# Altium PCB AD8317.PcbDoc
Units mil, origin at the board's own origin, x right, y up, seen from the top; angles counter-clockwise.
Board outline 658 x 549 mil, 4 copper layers (Top Layer, Layer 1, Layer 2, Bottom Layer), stack 23.756 mil thick; 16 components, 9 nets, 47 pads, 45 vias.
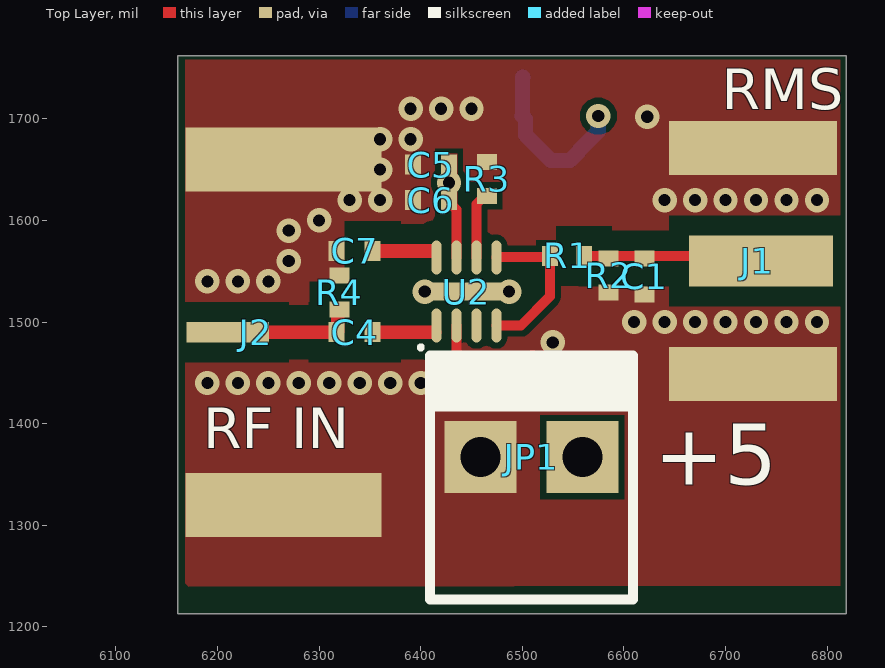
[diagram p0: Top Layer view]
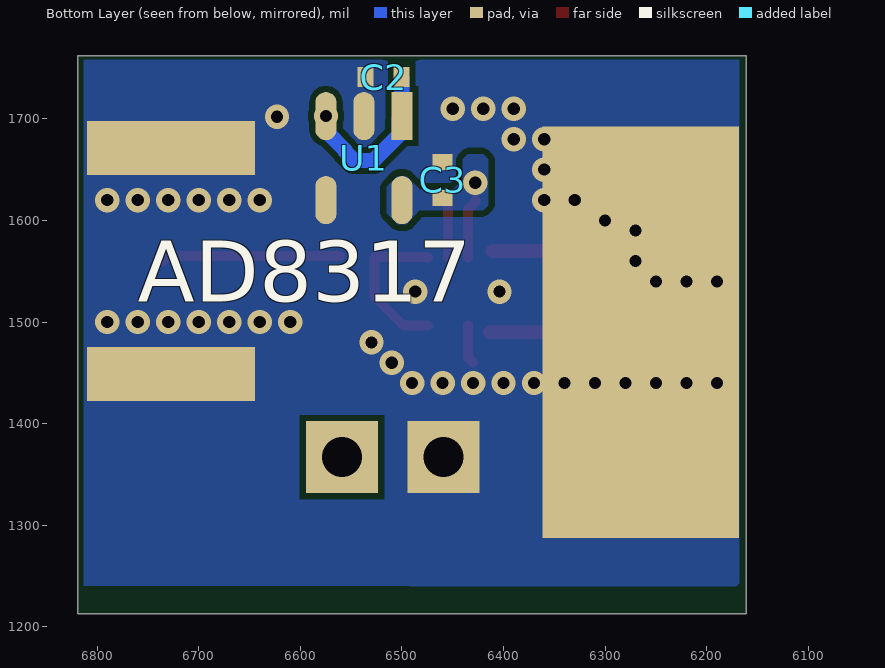
[diagram p1: Bottom Layer view, seen from below]
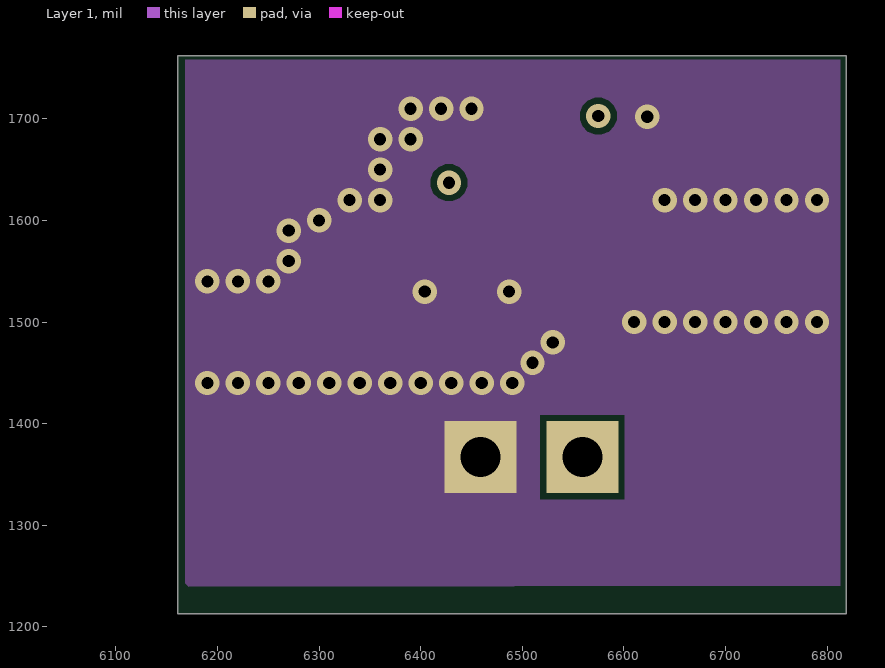
[diagram p2: Layer 1]
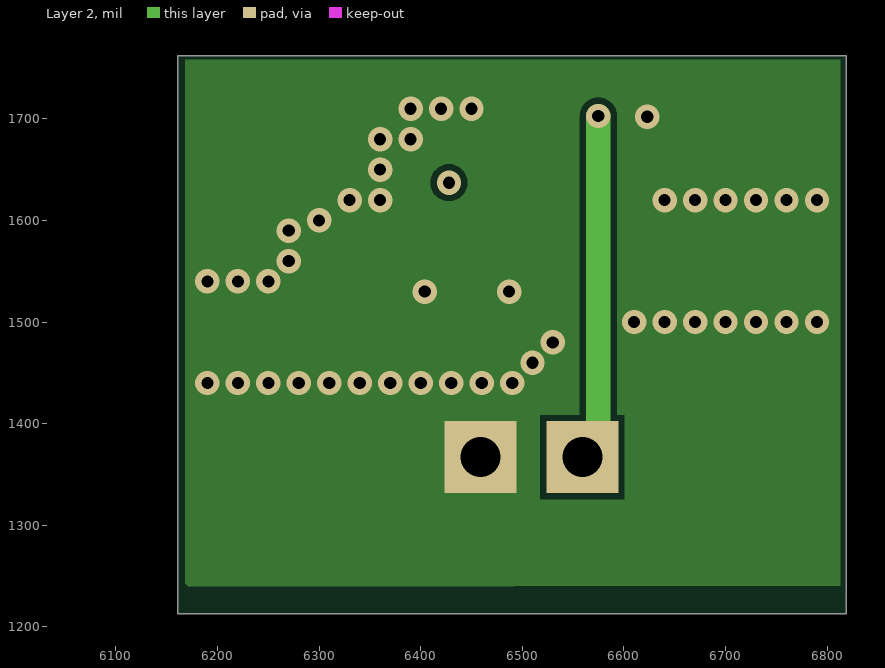
[diagram p3: Layer 2]

## Layer stack, top to bottom
Top Solder: solder mask 0.4, Solder Resist, Dk 3.5
Top Layer: signal copper 1.4
Dielectric 2: prepreg 2.8, PP-006, Dk 4.1
Layer 1: signal copper 1.378
Dielectric 1: dielectric 12.6, FR-4, Dk 4.8
Layer 2: signal copper 1.378
Dielectric 3: prepreg 2.8, PP-006, Dk 4.1
Bottom Layer: signal copper 1.4
Bottom Solder: solder mask 0.4, Solder Resist, Dk 3.5

## Board outline
6161,1213 6161,1762 6819,1762 6819,1213

## Design rules (kind name [scope] priority, off if disabled: settings)
Clearance CTRL [InNetClass('CTRL')] p1: gap=20 ignorepadtopadclearanceinfootprint=TRUE except(6: Arc-Arc Arc-Track Arc-SMDPad Arc-THPad Arc-Via Arc-Text Arc-Hole Track-Track Track-SMDPad Track-THPad Track-Via Track-Text Track-Hole SMDPad-SMDPad SMDPad-THPad SMDPad-Via SMDPad-Text SMDPad-Hole THPad-THPad THPad-Via THPad-Text THPad-Hole Via-Via Via-Text Via-Hole Text-Text Text-Hole)
Clearance [All] p2: gap=6 ignorepadtopadclearanceinfootprint=TRUE
PlaneConnect [All] p1: planeconnectstyle=Direct reliefexpansion=20 reliefentries=4 reliefconductorwidth=10 reliefairgap=10
PolygonConnect [All] p1: connectstyle=Direct reliefconductorwidth=10 reliefentries=4 polygonreliefangle="90 Angle" airgapwidth=10
RoutingVias [All] p1: holewidth=28 width=50 viastyle="Through Hole" minholewidth=28 minwidth=50 maxholewidth=28 maxwidth=50
SolderMaskExpansion [All] p1: expansion=4 istentingtop=FALSE
Width [All] p1: maxlimit=40 minlimit=9.84 preferedwidth=10
29 further rules are at their usual default settings.

## Classes and differential pairs
net class CTRL: INHI INLO NetC4_1 RMSOUT

## Components (designator, comment, footprint, x,y, rotation, side; value= is the part's Value field where it differs from the comment)
C1 "OPEN" "C 0402_L" 6620,1545 r90 top
C2 "1uF" "C 0402_L" 6518,1741 r0 bottom
C3 "1uF" "C 0402_L" 6460,1640 r270 bottom
C4 "47nF" "C 0402_L" 6335,1490 r0 top
C5 "100nF" "C 0402_L" 6410,1655 r0 top
C6 "100pF" "C 0402_L" 6410,1620 r0 top
C7 "47nF" "C 0402_L" 6335,1570 r0 top
J1 "SMA-J-P-H-ST-EM1" FP-SMA-J-P-H-ST-EM1-MFG 6997.2,1560 r90 top
J2 "132414" CONN_132414_AMP 6065,1490 r90 top
JP1 "HDR-1X2" KF2510-LI-2P 6509,1367 r0 top
R1 "1K" "R 0402_L" 6545,1565 r180 top
R2 "OPEN" "R 0402_L" 6585,1545 r90 top
R3 "10K" "R 0402_L" 6465,1640 r90 top
R4 "52.3" "R 0402_L" 6320,1530 r270 top
U1 "TPS7A2033PDBVR" FP-DBV0005A-IPC_C 6537.4,1661.36 r270 bottom
U2 "AD8317ACPZ-R7" ADI-CP-8-1_L 6445,1530 r90 top

## Footprints (in the part's own frame and the unit in brackets; to place one, negate y for a bottom-side part, rotate by r counter-clockwise, add the part's x,y. Pads: shape width x height; smd on the part's side, far side on the other; paste and mask are expansions set on the pad)
ADI-CP-8-1_L [mm] "SON, 8-Leads, Body 3x2mm, Pitch 0.5mm, Thermal Pad 1.75x0.45mm, IPC High Density"
  oval 0.85x0.25 smd mask+0: 1(-0.85,0.75) 2(-0.85,0.25) 3(-0.85,-0.25) 4(-0.85,-0.75) 5(0.85,-0.75) 6(0.85,-0.25) 7(0.85,0.25) 8(0.85,0.75)
  rect 0.45x1.75 smd mask+0: 9(0,0)
  silkscreen extent -1.45,1.09 -1.35,1.19, body extent -1.12,-1.63 1.13,1.63, height 1
"C 0402_L" [mm] "无极性贴片电容"
  rect 0.4x0.5 smd mask+0: 1(-0.45,0) 2(0.45,0)
  body extent -0.5,-0.26 0.5,0.26, height 0.53
CONN_132414_AMP [mil]
  rect 20x81 smd paste+0 mask+0: 1(0,-145)
  rect 63x193 smd mask+0: 2(-170,-200) 3(170,-200)
  rect 405x193 smd far side mask+0: 4(0,-200)
  body extent -188,-292 188,270, height 162
FP-DBV0005A-IPC_C [mm]
  rect 1.205x0.532 smd paste+0 mask+0: 1(-1.05,0.95)
  rrect100% 1.205x0.532 smd paste+0 mask+0: 2(-1.05,0) 3(-1.05,-0.95) 4(1.05,-0.95) 5(1.05,0.95)
  body extent -1.4,-1.45 1.4,1.45, height 1.45
FP-SMA-J-P-H-ST-EM1-MFG [mm]
  rect 1.27x3.6 smd paste+0 mask+0: 1(0,6.66)
  rect 1.35x4.2 smd paste+0 mask+0: 2(-2.825,6.86) 2(2.825,6.86)
  rect 1.35x4.2 smd far side paste+0 mask+0: 2(-2.825,6.86) 2(2.825,6.86)
  body extent -3.6,-4.92 3.6,9.06, height 0.25
KF2510-LI-2P [mm] "接插件/2A"
  rect 1.8x1.8 hole 1 mask+0: 1(-1.27,0) 2(1.27,0)
  silkscreen extent -2.59,-3.56 2.54,2.54, body extent -2.54,-3.5 2.54,2.4, height 11.05
"R 0402_L" [mm] "1/16W贴片电阻 https://item.taobao.com/item.htm?ft=t&id=613637044352"
  rect 0.4x0.5 smd mask+0: 1(-0.4,0) 2(0.45,0)
  body extent -0.5,-0.25 0.5,0.25, height 0.3

## Part data
C1 C2 C3 C4 C5 C6 C7: library part C, "贴片电容", BOM名称=贴片电容, 下单链接=https://item.taobao.com/item.htm?ft=t&id=613637044352, 淘宝ID=小糖豆的小窝窝
J1: library part CMP-02754-000006-1, "CONN SMA JACK STR 50OHM EDGE MNT", Case/Package=SMA, Dielectric Material=PTFE, Housing Color=Gold, Max Frequency=6GHz, Max Operating Temperature=125°C, Min Operating Temperature=-65°C, Package Quantity=1, Voltage Rating=335V, Body Material=Brass, Body Plating=Gold, Center Contact Plating=Gold, Connector Type=SMA, Contact Material=Copper, Contact Plating=Gold, Depth=13.33mm, Fastening Type=Threaded, Impedance=50R, Insulation Material=Polytetrafluoroethylene, Length=6.35mm, Mount=Edge, Orientation=Straight, Packaging=Tray, Radiation Hardening=No, RoHS Compliant=Yes, Series=SMA, Termination=Solder
J2: "No Description Available", Mfr_Name="Amphenol ICC", Copyright="Copyright (C) 2022 Ultra Librarian. All rights reserved.", Manufacturer_Part_Number=132414, RefDes=RefDes, Type=DEV
JP1: library part "Header 2", "2P接插件", BOM名称=2P接插件, 下单链接=https://item.taobao.com/item.htm?ft=t&id=613637044352, 淘宝ID=小糖豆的小窝窝
R1 R2 R3 R4: library part R, "贴片电阻", BOM名称=贴片电阻, 下单链接=https://item.taobao.com/item.htm?ft=t&id=613637044352, 淘宝ID=小糖豆的小窝窝
U1: library part TPS7A2050, "300-mA, ultra-low-noise, low-IQ, low-dropout (LDO) linear regulator with high PSRR 5-SOT-23 -40 to 125", RoHS Compliant=Yes
U2: library part CMP-0284-00065-1, "1 MHz to 10 GHz, 55 dB Log Detector/Controller, 6ns Response Time, CP-8-1, Pb-Free, 3000 Reel", RF Frequency (MHz)="1 to 10000", Supply Current=22mA, Temp Stability (dB)=500mdB, Voltage Supply (V)="3 to 5.5", ComponentLink1Description="Manufacturer URL", ComponentLink1URL=www.analog.com, ComponentLink2Description=Datasheet, ComponentLink2URL=http://www.analog.com/static/imported-files/data_sheets/AD8317.pdf, ComponentLink3Description="Package Specification", ComponentLink3URL=http://www.analog.com/static/imported-files/packages/PKG_PDF/LFCSP(CP)/CP-8/CP_8_1.pdf, DatasheetVersion="Rev. B", Dynamic Range (dB)=55dB, PackageDescription="8-Lead Lead Frame Chip Scale Package [LFCSP_VD]", PackageReference=CP-8-1, PackageVersion=031207-A, Product Description="Available in Die", Response Time (ns typ)=6ns

## Via types
v1: diameter 24, hole 12, Top Layer to Bottom Layer, tented both sides, 45 vias

## Nets (pads, with @x,y where several pads share a name; then routed paths per layer and width w, separated by ;. In a path a pad name is that pad's centre, name@x,y a point inside that pad or via, vN(x,y) a via of type N, cw(c..) or ccw(c..) an arc to the next point about the centre after c; other vN are vias at no path point)
3V3: C3.2 C5.2 C6.2 U1.5 U2.7 | length 59.6
  Top Layer w9.84: C6.2 6427.71,1618.03 6435.16,1610.58 U2.7
  other v1: 6427.8,1637.19
+5: C2.1 JP1.2 U1.1 U1.3 | length 510.6
  Layer 2 w24: JP1.2 6574.76,1382.76 v1(6574.76,1702.76)
  Bottom Layer w15: C2.1@6500.24,1741.04 C2.1 6500.14,1740.86 6500.14,1702.86 U1.1 6502.98,1699.74 6502.98,1684.02 6528,1659 6547,1659 6555.79,1667.79 6555.79,1668.84 6574.8,1687.86 U1.3 v1(6574.76,1702.76)
  Bottom Layer w20: JP1.2 JP1.2@6559.2,1366.8
GND: C1.1 C2.2 C3.1 C5.1 C6.1 C7.1 J1.2 J2.2 J2.3 J2.4 JP1.1 R2.1 R3.2 R4.1 U1.2 U1.4 U2.2 U2.9 | length 38.7
  Top Layer w9.84: 6430,1460 6435.16,1465.16 U2.2
  other v1: 6190,1440 6220,1440 6250,1440 6280,1440 6310,1440 6340,1440 6370,1440 6400,1440 6430,1440 6460,1440 6490,1440 6510,1460 6530,1480 6610,1500 6640,1500 6670,1500 6700,1500 6730,1500 6760,1500 6790,1500 6404,1530 6487,1530 6190,1540 6220,1540 6250,1540 6270,1560 6270,1590 6300,1600 6330,1620 6360,1620 6640,1620 6670,1620 6700,1620 6730,1620 6760,1620 6790,1620 6360,1650 6360,1680 6390,1680 6623,1702 6390,1710 6420,1710 6450,1710
INHI: C4.2 U2.1 | length 60.8
  Top Layer w13.48: C4.2 U2.1@6413.5,1490
INLO: C7.2 U2.8 | length 58.5
  Top Layer w13.48: C7.2 U2.8@6411.21,1570
NetC4_1: C4.1 J2.1 R4.2 | length 131
  Top Layer w13.48: J2.1 C4.1 6318.42,1491.13 6318.42,1511.15 6319.55,1512.29 R4.2
NetR1_2: R1.2 U2.4 U2.5 | length 156.5
  Top Layer w9.84: U2.4 6498.54,1496.54 6527,1525 6527,1563.75 6526.52,1564.23 6474.53,1564.23 U2.5
NetR3_1: R3.1 U2.6 | length 66.1
  Top Layer w9.84: U2.6 6454.84,1616.06 6463.03,1624.25 R3.1
RMSOUT: C1.2 J1.1 R1.1 R2.2 | length 176.3
  Top Layer w9.84: R1.1 6730,1565 J1.1
pads on no net: U2.3

## Polygon pours and split planes (outlines as drawn)
GND on Bottom Layer "NONET_L-01_P-001" (solid, remove dead copper, pour order 3): 6168,1758 6813,1758 6813,1240.43 6168,1239.45
3V3 on Bottom Layer "NONET_L-01_P-001" (solid, remove dead copper, pour order 0): 6450,1630 6440,1640 6440,1660 6435,1665 6420,1665 6415,1660 6415,1615 6420,1610 6482.82,1610 6495.3,1596.27 6497.46,1596.27 6504.34,1596.27 6515,1606.93 6515,1633 6504.31,1643.69 6495.69,1643.69 6482,1630
GND on Top Layer "NONET_L-01_P-001" (solid, remove dead copper, pour order 2): 6168,1758 6813,1758 6813,1240.43 6168,1239.45
3V3 on Top Layer "NONET_L-01_P-001" (solid, remove dead copper, pour order 1): 6420,1665 6420,1610 6436,1610 6436,1665
GND on Layer 1 "NONET_L-01_P-001" (solid, remove dead copper, pour order 4): 6168,1758 6813,1758 6813,1240.43 6168,1239.45
GND on Layer 2 "NONET_L-01_P-001" (solid, remove dead copper, pour order 5): 6168,1758 6813,1758 6813,1240.43 6168,1239.45

## Silkscreen, mask and mechanical layers (free items; w line width, h text height)
Top Overlay:
  text "RMS" at 6696.45,1709.27 h40
  text "RF IN" at 6186,1376 h40
  text "+5" at 6630,1340 h60
Bottom Overlay:
  text "AD8317" at 6760,1520 h60
Mechanical 1:
  the board outline again, w10